# Altium PCB KAAI3020_TESTPcbDoc.PcbDoc (part 3 of 3)
Units mil, origin at the board's own origin, x right, y up, seen from the top; angles counter-clockwise.
Board outline 6000 x 5905.51 mil, 4 copper layers (Top Layer, Inner Layer L2, Inner Layer L3, Bottom Layer), stack 62.449 mil thick; 253 components, 94 nets, 550 pads, 119 vias.
Unrouted connection lines stored in the file: 5.
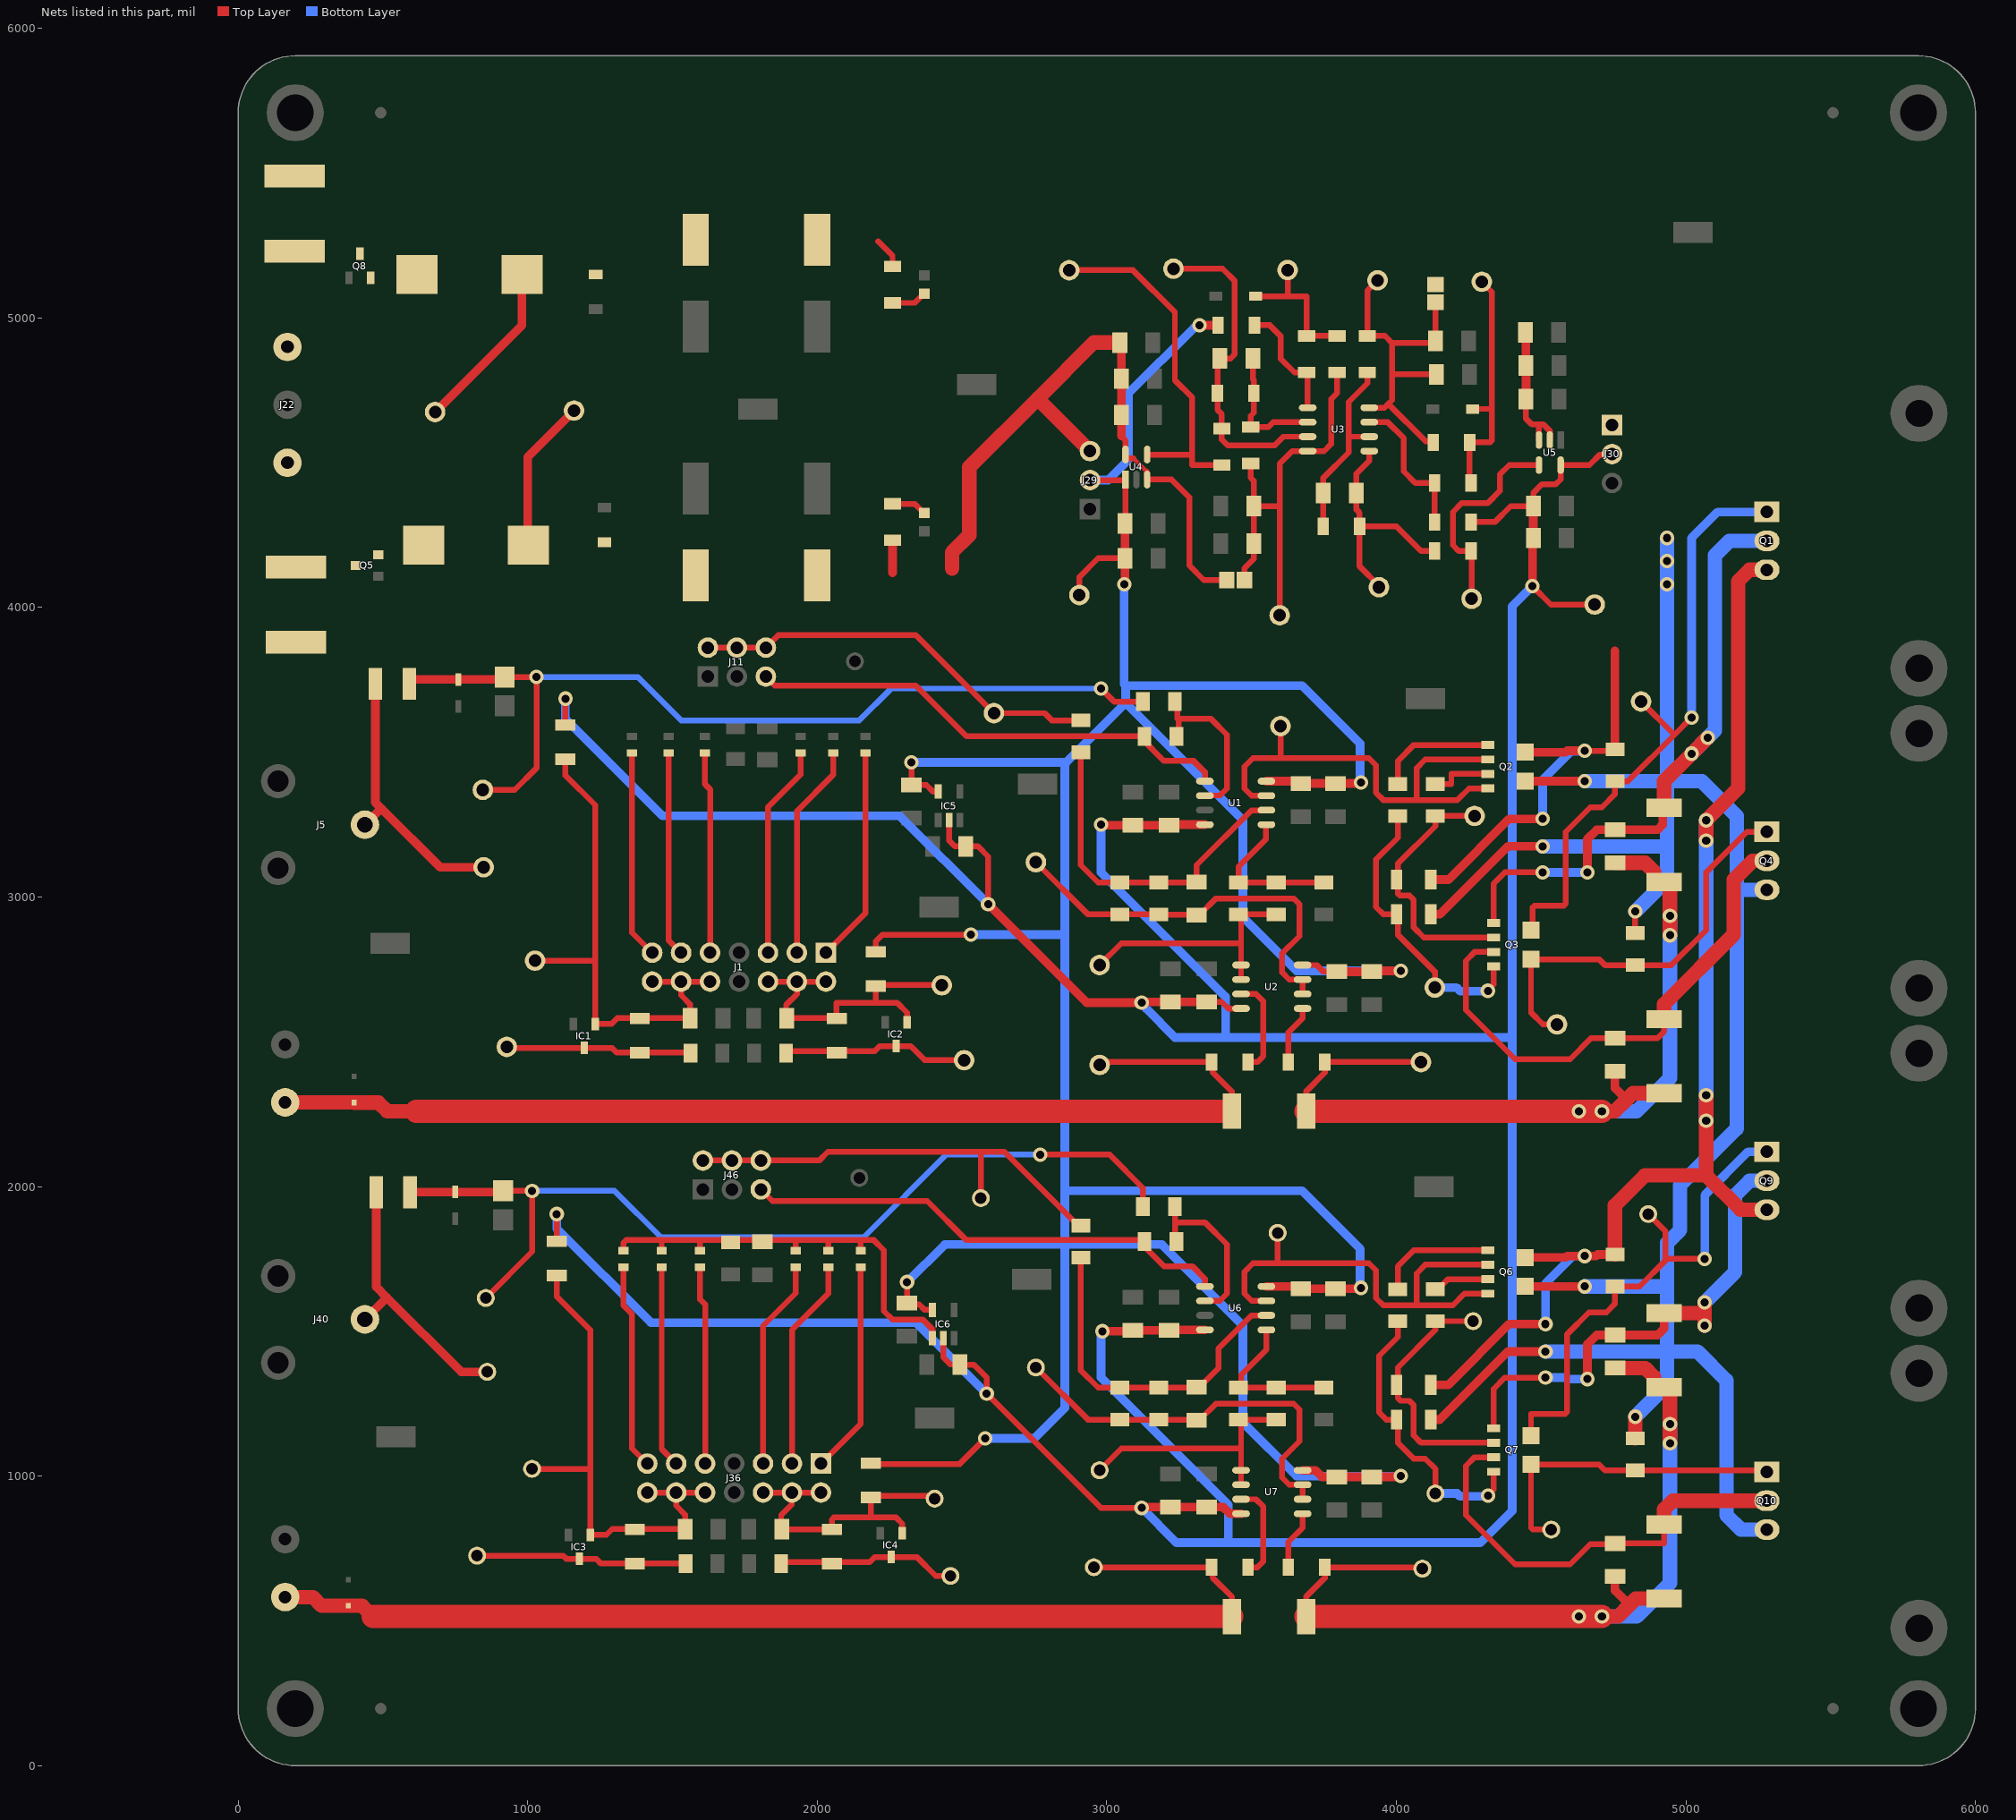
[diagram p4: the nets of this part, all layers, seen from the top]

## Via types
v1: diameter 50, hole 28, Top Layer to Bottom Layer, tented both sides, 117 vias
v2: diameter 50, hole 28, Top Layer to Bottom Layer, 2 vias

## Nets (pads, with @x,y where several pads share a name; then routed paths per layer and width w, separated by ;. In a path a pad name is that pad's centre, name@x,y a point inside that pad or via, vN(x,y) a via of type N, cw(c..) or ccw(c..) an arc to the next point about the centre after c; other vN are vias at no path point) (continued)
NetC4_1: C4.1 C5.2 J15.1 R20.1 R21.2 R23.2 R25.1 | length 3251.6
  Top Layer w20: R21.2@3687.95,2260 3687.95,2327.95 3752.99,2392.99 R25.1@3752.99,2430 J15.1@4085,2430
  Top Layer w30: C5.2@4755,2397.91 4755,2340 4795,2300
  Top Layer w50: v1(4710,2260) 4755,2260 4795,2300 4817.05,2322.05 R23.2@4925,2322.05 ; C4.1@4755,3117.91 4859.13,3117.91 4888.98,3088.07 4888.98,3058.54 4895.47,3052.05 R20.1@4947.26,3052.05 ; R20.1@4938.5,3052.05 4945,3045.55 v1(4945,2867.95)
  Top Layer w80: R21.2@3687.95,2260 v1(4630.84,2260) v1(4710,2260)
  Bottom Layer w50: v1(4630.84,2260) v1(4710,2260) 4830,2260 4945,2375 v1(4945,2935)
NetC4_2: C4.2 Q1.2 Q3.1 R20.2 | length 2154.9
  Top Layer w20: Q3.1@4336.06,2910 4336.06,3046.06 4375,3085 v1(4505,3085)
  Top Layer w30: v1(4660,3085) 4660,3200 4692.09,3232.09 C4.2@4755,3232.09 4902.09,3232.09 4920,3250 4920,3302.95 R20.2@4925,3307.95
  Top Layer w50: R20.2@4925,3307.95 4925,3400 v2(5020,3495) v2(5075,3550)
  Bottom Layer w30: v1(4505,3085) v1(4660,3085)
  Bottom Layer w50: v2(5020,3495) v2(5075,3550) 5100,3575 5100,4180 5150,4230 Q1.2@5280,4230
NetC5_1: C5.1 Q3.3 Q4.2 R23.1 | length 1839.6
  Top Layer w20: Q3.3@4336.06,2810 4270,2810 4240,2780 4240,2610 4410,2440 4600,2440 4672.09,2512.09 C5.1@4755,2512.09 4902.09,2512.09 4925,2535 R23.1@4925,2577.95
  Top Layer w50: R23.1@4925,2577.95 4925,2630 5165,2870 5165,3060 5230.05,3125.05 Q4.2@5280,3125.05
NetC6_1: C6.1 R22.1 R29.1 R30.1 U1.6 | length 1194.7
  Top Layer w20: R22.1@2910,3499.76 2910,3110 2969.88,3050.12 R30.1@3045,3050.12 3127.17,3050.12 R29.1@3180,3050.12 ; R29.1@3180.98,3051.1 R29.1@3180,3050.12 ; U1.6@3551.3,3300 3550.61,3299.31 3499.31,3299.31 3310,3110 C6.1@3310,3052.09 3308.03,3050.12 R29.1@3180,3050.12
NetC6_2: C6.2 J19.1 R29.2 R30.2 U2.6 U2.7 | length 1409.4
  Top Layer w20: J19.1@2755,3120 2935.12,2939.88 R30.2@3045,2939.88 R29.2@3180,2939.88 3180.98,2938.9 C6.2@3309.02,2938.9 ; C6.2@3310,2937.91 C6.2@3309.02,2938.9 ; U2.6@3676.3,2665 U2.7@3676.3,2715 3630,2715 3605,2740 3605,2805 3665,2865 3665,2975 3645,2995 3376.93,2995 3320.83,2938.9 C6.2@3309.02,2938.9
NetC24_1: C24.1 R37.1 R38.2 U3.6 | length 446.9
  Top Layer w20: C24.1@3504.09,4860 3504.09,4788.93 3507.99,4785.04 R38.2@3507.99,4740 3507.99,4672.99 3497.01,4662.01 R37.1@3497.01,4622.99 3557.99,4622.99 3575,4640 U3.6@3693.7,4640
NetC24_2: C24.2 J25.1 R38.1 R39.1 U3.7 | length 1147.9
  Top Layer w20: J25.1@3230,5170 3400,5170 3442.01,5127.99 3442.01,4875 3427.01,4860 C24.2@3389.92,4860 3382.01,4852.09 R38.1@3382.01,4740 3382.01,4682.99 3397.01,4667.99 R39.1@3397.01,4617.99 3397.01,4580 3417.43,4559.58 3579.58,4559.58 3610,4590 U3.7@3693.7,4590
NetC33_1: C33.1 R41.1 R42.2 U3.2 | length 666.7
  Top Layer w20: R42.2@3747.01,4280 3747.01,4394.09 C33.1@3747.91,4395 3747.91,4447.91 3835,4535 3835,4590 ; R41.1@3900,4812.01 3900,4775 3835,4710 3835,4590 ; U3.2@3906.3,4590 3835,4590
NetC33_2: C33.2 J34.1 R40.2 R42.1 U3.1 | length 814.8
  Top Layer w20: U3.1@3906.3,4540 3906.3,4506.3 3862.09,4462.09 C33.2@3862.09,4395 3862.09,4337.91 3872.99,4327.01 R42.1@3872.99,4280 ; J34.1@3940,4070 3940,4075 3872.99,4142.01 R42.1@3872.99,4280 ; R40.2@4132.01,4195 4085,4195 4000,4280 R42.1@3872.99,4280
NetC37_1: C37.1 IC6.1 R46.1 R47.1 R48.1 R49.1 R50.1 R51.1 R52.2 | length 1571.9
  Top Layer w20: R51.1@1330,1778.54 1330,1804.84 1340,1814.84 1460,1814.84 ; R50.1@1462.6,1778.54 1462.6,1812.24 1460,1814.84 ; R49.1@1595.2,1780.39 1595.2,1814.64 1595,1814.84 ; R52.2@1700.2,1806.96 R52.2@1700.2,1814.84 ; R48.1@1925.2,1780.39 1925.2,1810.68 1929.35,1814.84 ; R47.1@2037.7,1780.39 2037.7,1809.93 2042.6,1814.84 ; R46.1@2150.2,1780.39 2150.2,1814.64 2150,1814.84 ; IC6.1@2397.6,1475.79 2397.6,1507.4 2365,1540 2260,1540 2230,1570 2230,1780 2195.16,1814.84 2150,1814.84 ; 1460,1814.84 1595,1814.84 ; 1595,1814.84 R52.2@1700.2,1814.84 ; R52.2@1700.2,1814.84 1804.29,1814.84 C37.1@1810.2,1808.93 1816.1,1814.84 1929.35,1814.84 ; 1929.35,1814.84 2042.6,1814.84 ; 2042.6,1814.84 2150,1814.84
NetC38_1: C38.1 C39.2 J50.1 R65.1 R66.2 R68.2 R70.1 | length 3254.1
  Top Layer w20: R66.2@3687.95,515 3687.95,582.95 3752.99,647.99 R70.1@3752.99,685 4085,685 J50.1@4090,680
  Top Layer w30: C39.2@4755,652.91 4755,605 4805,555
  Top Layer w50: v1(4710,515) 4765,515 4805,555 4827.05,577.05 R68.2@4925,577.05 ; C38.1@4755,1372.91 4859.13,1372.91 4888.98,1343.07 4888.98,1313.54 4895.47,1307.05 4938.5,1307.05 4945,1300.55 v1(4945,1112.95)
  Top Layer w80: R66.2@3687.95,515 v1(4630.84,515) v1(4710,515)
  Bottom Layer w50: v1(4630.84,515) v1(4710,515) 4830,515 4945,630 v1(4945,1180)
NetC38_2: C38.2 Q7.1 Q9.2 R65.2 | length 1784.3
  Top Layer w20: Q7.1@4336.06,1165 4336.06,1301.06 4375,1340 v1(4515,1340)
  Top Layer w30: v1(4660,1335) 4660,1455 4692.09,1487.09 C38.2@4755,1487.09 4902.09,1487.09 4925,1510 R65.2@4925,1562.95
  Top Layer w50: R65.2@4925,1562.95 5062.05,1562.95 5065,1560 ; v1(5065,1520) 5065,1560 ; v1(5065,1600) 5065,1560
  Bottom Layer w30: v1(4515,1340) 4585,1340 4590,1335 v1(4660,1335)
  Bottom Layer w50: v1(5065,1520) v1(5065,1600) 5170,1705 5170,1969.89 5220.05,2019.95 Q9.2@5280,2019.95
NetC39_1: C39.1 Q7.3 Q10.2 R68.1 | length 1549
  Top Layer w20: Q7.3@4336.06,1065 4270,1065 4240,1035 4240,865 4410,695 4600,695 4670,765 4742.09,765 4744.17,767.09 4925,767.09 R68.1@4925,832.95
  Top Layer w50: R68.1@4925,832.95 4925,885 4954.84,914.84 Q10.2@5280,914.84
NetC40_1: C40.1 R67.1 R74.1 R75.1 U6.6 | length 1199.1
  Top Layer w20: R67.1@2910,1754.76 2910,1365 2969.88,1305.12 R75.1@3045,1305.12 3127.17,1305.12 R74.1@3180,1305.12 3180.98,1306.1 3318.86,1306.1 3385,1372.24 3385,1440 3499.31,1554.31 3550.61,1554.31 U6.6@3551.3,1555
NetC40_2: C40.2 J54.1 R74.2 R75.2 U7.6 U7.7 | length 1409.4
  Top Layer w20: J54.1@2755,1375 2935.12,1194.88 R75.2@3045,1194.88 R74.2@3180,1194.88 3180.98,1193.9 C40.2@3309.02,1193.9 ; C40.2@3310,1192.91 C40.2@3309.02,1193.9 ; U7.6@3676.3,920 U7.7@3676.3,970 3630,970 3605,995 3605,1060 3665,1120 3665,1230 3645,1250 3376.93,1250 3320.83,1193.9 C40.2@3309.02,1193.9
NetD1_2: D1.2 J2.1 J16.1 R21.1 R26.1 | length 3864.5
  Top Layer w20: J16.1@2975,2420 2983.96,2428.96 3002.78,2428.96 3003.82,2430 R26.1@3362.01,2430 3365.11,2426.9 3365.11,2394.89 3432.05,2327.95 R21.1@3432.05,2260
  Top Layer w50: J2.1@162.16,2290.63 400,2290.63 D1.2@400,2290.12 484.33,2290.12 514.45,2260 615,2260
  Top Layer w80: 615,2260 R21.1@3423.54,2260
NetD2_1: D2.1 F1.2 J4.1 R16.2 R79.2 | length 3193.9
  Top Layer w20: D2.1@760,3751.26 D2.1@760.08,3751.34 ; J4.1@845,3370 955,3370 1030,3445 v1(1030,3760) R79.2@920,3760 ; v1(2980,3720) 3025,3675 R16.2@3117.01,3675
  Top Layer w30: F1.2@590.63,3736.34 590.63,3743.03 598.86,3751.26 D2.1@760,3751.26 ; D2.1@760.08,3751.34 R79.2@920,3751.34
  Bottom Layer w20: v1(1030,3760) 1380,3760 1530,3610 2145,3610 2255,3720 v1(2980,3720)
NetD3_2: D3.2 J24.1 R34.2 R36.2 | length 508.9
  Top Layer w20: D3.2@3513.9,5075 3515,5075 3625,5075 ; J24.1@3624.6,5165.4 3625,5165.4 3625,5075 ; R36.2@3795,4937.99 R34.2@3690,4937.99 3690,5075 3625,5075
NetD4_1: D4.1 J35.1 R43.1 R44.2 | length 850.6
  Top Layer w20: R44.2@4257.99,4430 4252.99,4435 R43.1@4252.99,4570 4323.12,4570 4330,4576.88 4330,4685.79 ; D4.1@4263.9,4685.79 4330,4685.79 ; J35.1@4295,5125 4330,5090 4330,4685.79
NetD5_2: D5.2 J37.1 J51.1 R66.1 R71.1 | length 3871.6
  Top Layer w20: J51.1@2955,685 R71.1@3362.01,685 3365.11,681.9 3365.11,649.89 3432.05,582.95 R66.1@3432.05,546.96
  Top Layer w50: J37.1@162.16,581.84 258.16,581.84 288.04,551.96 D5.2@380.2,551.96 428.04,551.96 465,515
  Top Layer w80: 465,515 R66.1@3432.05,515
NetD6_1: D6.1 F4.2 J39.1 R61.2 R80.2 | length 3272.5
  Top Layer w20: F4.2@593.46,1980 F4.2@594.72,1981.26 ; J39.1@855,1615 1015,1775 v1(1015,1985) R80.2@915,1985 ; R80.2@910.08,1981.26 915,1976.34 R80.2@918.66,1980 ; v1(2770,2110) 3010,2110 3124.88,1995.12 R61.2@3124.88,1930
  Top Layer w30: F4.2@594.72,1981.26 D6.1@750,1981.26 R80.2@910.08,1981.26
  Bottom Layer w20: v1(1015,1985) 1300,1985 1460,1825 2160,1825 2445,2110 v1(2770,2110)
NetF1_1: F1.1 J3.1 J5.1 | length 956.3
  Top Layer w30: J5.1@437.8,3250 492.8,3305 495,3305 ; F1.1@473.7,3736.34 473.7,3326.3 495,3305 ; J3.1@847.33,3102.67 697.33,3102.67 495,3305
NetF2_1: F2.1 J22.1
NetF2_2: F2.2 Q5.3
NetF3_1: F3.1 J22.3
NetF3_2: F3.2 Q8.3
NetF4_1: F4.1 J38.1 J40.1 | length 938.8
  Top Layer w30: J40.1@437.8,1541.21 512.5,1615.92 512.5,1617.5 ; F4.1@476.54,1980 476.54,1653.46 512.5,1617.5 ; J38.1@860,1360 770,1360 512.5,1617.5
NetIC1_3: IC1.3 J8.1 R11.1 R13.2 | length 643.3
  Top Layer w20: J8.1@927.5,2482.5 931.34,2478.66 IC1.3@1194.96,2478.66 1291.34,2478.66 1307.72,2462.28 R11.1@1387.16,2462.28 1561.1,2462.28 R13.2@1562.04,2461.34
NetIC2_3: IC2.3 J9.1 R12.1 R14.2 | length 644.8
  Top Layer w20: R14.2@1892.28,2461.34 1898.23,2467.28 2067.16,2467.28 2198.11,2467.28 2215.82,2485 IC2.3@2272.16,2485 2322.3,2485 2370.96,2436.34 J9.1@2507.16,2436.34
NetIC3_3: IC3.3 J43.1 R56.1 R58.2 | length 725.2
  Top Layer w20: J43.1@825,725 1122.31,725 1133.14,714.17 IC3.3@1177.99,714.17 1236.41,714.17 1252.79,697.79 R56.1@1370.2,697.79 ; R56.1@1376.75,697.79 1544.13,697.79 R58.2@1545.08,696.84
NetIC4_3: IC4.3 J44.1 R57.1 R59.2 | length 621.6
  Top Layer w20: R59.2@1875.31,696.84 1881.26,702.79 2050.2,702.79 2181.14,702.79 2198.86,720.51 IC4.3@2255.2,720.51 2343.71,720.51 2409.22,655 J44.1@2460,655
NetJ1_1: J1.1 R1.2 | length 747.2
  Top Layer w20: J1.1@2029.64,2807.6 2167.16,2945.12 R1.2@2167.16,3497.8
NetJ1_3: J1.3 R2.2 | length 742
  Top Layer w20: J1.3@1929.64,2807.6 1929.64,3296.81 2054.66,3421.83 R2.2@2054.66,3497.8
NetJ1_5: J1.5 R3.2 | length 736.8
  Top Layer w20: J1.5@1829.64,2807.6 1829.64,3310.46 1942.16,3422.98 R3.2@1942.16,3497.8
NetJ1_9: J1.9 R4.2 | length 697.4
  Top Layer w20: R4.2@1612.16,3497.8 1612.16,3389.57 1629.64,3372.09 J1.9@1629.64,2807.6
NetJ1_11: J1.11 R5.2 | length 708.2
  Top Layer w20: R5.2@1486.08,3497.8 1486.08,2851.16 J1.11@1529.64,2807.6
NetJ1_13: J1.13 R6.2 | length 719
  Top Layer w20: R6.2@1360,3497.8 1360,2877.24 1377.16,2860.08 J1.13@1429.64,2807.6
NetJ10_1: J10.1 J11.2 J11.4 J11.6 R22.2 | length 1428.1
  Top Layer w20: J11.2@1622.16,3861.34 J11.4@1722.16,3861.34 J11.6@1822.16,3861.34 1865.82,3905 2340,3905 J10.1@2610,3635 2785,3635 2810,3610 R22.2@2910,3610
NetJ11_5: J11.5 R15.2 U1.1 | length 1683
  Top Layer w20: J11.5@1822.16,3761.34 1853.5,3730 2340,3730 2515,3555 3112.32,3555 3122.01,3545.31 3122.01,3545.16 3197.17,3470 3300,3470 3338.7,3431.3 U1.1@3338.7,3401.59
NetJ12_1: J12.1 Q3.2 R17.1 R19.2 | length 906.7
  Top Layer w20: J12.1@4270,3280 4135.12,3280 R19.2@4135,3279.88 4135,3245 4004.88,3114.88 4004.88,3060 4004.88,3011.88 4011.77,3005 4045,3005 4060,2990 4060,2895 4095,2860 Q3.2@4336.06,2860
NetJ13_1: J13.1 Q1.1 Q3.7_8 R18.1 | length 2153.8
  Top Layer w20: Q3.7_8@4465,2885 4470,2890 4470,2963.12 4476.88,2970 4578.12,2970 4585,2976.88 4585,3225 4670,3310 4710,3310 4755,3355 R18.1@4755,3399.88 4799.88,3399.88 4960,3560 ; J13.1@4845,3675 4960,3560 ; v1(5020,3620) 4960,3560
  Bottom Layer w30: v1(5020,3620) 5020,4240 5110,4330 Q1.1@5280,4330
NetJ14_1: J14.1 Q2.2 Q2.4 U1.7 | length 1628
  Top Layer w20: U1.7@3551.3,3350 3500,3350 3475,3375 3475,3450 3505,3480 3595,3480 ; J14.1@3600,3590 3600,3485 3595,3480 ; Q2.4@4316.06,3375 4250.77,3375 4210.77,3335 4070,3335 ; Q2.2@4316.06,3475 4100,3475 4070,3445 4070,3335 ; 3595,3480 3905,3480 3930,3455 3930,3360 3955,3335 4070,3335
NetJ17_1: J17.1 Q3.4 R24.1 R27.2 | length 1017.8
  Top Layer w20: R24.1@4005,3279.76 4005,3205 3930,3130 3930,2965 3955,2940 4004.88,2940 4004.88,2870.12 4132.85,2742.15 J17.1@4132.85,2687.15 ; v1(4316,2676) 4316,2677.82 4336.06,2697.88 Q3.4@4336.06,2760
  Bottom Layer w30: J17.1@4132.85,2687.15 4207.85,2687.15 4220,2675 4315,2675 v1(4316,2676)
NetJ18_1: J18.1 Q3.5_6 Q4.1 R28.2 | length 1422.1
  Top Layer w20: J18.1@4555,2560 4505.99,2560 4465,2600.99 Q3.5_6@4465,2785 4700,2785 4720.12,2764.88 R28.2@4825,2764.88 4949.88,2764.88 5070,2885 5070,3085 5210.05,3225.05 Q4.1@5280,3225.05
NetJ20_1: J20.1 R31.2 R32.2 U2.1 U2.2 | length 878.3
  Top Layer w20: J20.1@2975,2765 3050,2840 3463.7,2840 ; U2.2@3463.7,2715 U2.1@3463.7,2765 3463.7,2840 ; R31.2@3585,2939.88 R32.2@3455,2939.88 3463.7,2931.18 3463.7,2840
NetJ27_1: J27.1 R39.2 U4.4 | length 1235.2
  Top Layer w20: J27.1@2870,5165 3090,5165 3235,5020 3235,4785 3295,4725 3295,4528 ; U4.4@3139.73,4528 3295,4528 ; R39.2@3397.01,4492.01 3295,4492.01 3295,4528
NetJ29_3: J29.3 U4.5
NetJ32_1: J32.1 R40.1 U5.4 | length 766.6
  Top Layer w20: R40.1@4257.99,4185.16 R40.1@4260,4183.15 ; J32.1@4260,4030 4260,4192.99 R40.1@4257.99,4195 4257.99,4204.69 4248.31,4195 4215,4195 4195,4215 4195,4330 4225,4360 4315,4360 4357.86,4402.86 4357.86,4459.86 4389.67,4491.68 U5.4@4492.6,4491.68
NetJ36_1: J36.1 R46.2 | length 737.2
  Top Layer w20: J36.1@2012.68,1043.1 2150.2,1180.62 R46.2@2150.2,1723.3
NetJ36_3: J36.3 R47.2 | length 732
  Top Layer w20: J36.3@1912.68,1043.1 1912.68,1505.32 2037.7,1630.34 R47.2@2037.7,1723.3
NetJ36_5: J36.5 R48.2 | length 726.8
  Top Layer w20: J36.5@1812.68,1043.1 1812.68,1519.16 1925.2,1631.68 R48.2@1925.2,1723.3
NetJ36_9: J36.9 R49.2 | length 687.4
  Top Layer w20: R49.2@1595.2,1723.3 1595.2,1610.08 1612.68,1592.6 J36.9@1612.68,1043.1
NetJ36_11: J36.11 R50.2 | length 700.9
  Top Layer w20: R50.2@1462.6,1723.3 1462.6,1093.18 J36.11@1512.68,1043.1
NetJ36_13: J36.13 R51.2 | length 712.6
  Top Layer w20: R51.2@1330,1721.46 1330,1590.2 1360.2,1560 1360.2,1095.58 J36.13@1412.68,1043.1
NetJ45_1: J45.1 J46.2 J46.4 J46.6 R67.2 | length 1587.8
  Top Layer w20: J46.2@1605,2090 J46.4@1705,2090 1796.84,2090 J46.6@1805,2081.84 ; J46.6@1805,2090 2006.87,2090 2036.87,2120 2565,2120 ; J45.1@2565.99,1960.99 J45.1@2565,1960 2565,2120 ; R67.2@2910,1865 2901.14,1865 2646.14,2120 2565,2120
NetJ46_5: J46.5 R60.2 U6.1 | length 1695
  Top Layer w20: J46.5@1805,1990 1845,1950 2380,1950 2515,1815 3122.01,1815 3122.01,1800.16 3197.17,1725 3295,1725 3338.7,1681.3 U6.1@3338.7,1656.59
NetJ47_1: J47.1 Q7.2 R62.1 R64.2 | length 905.7
  Top Layer w20: J47.1@4265,1535 4135.12,1535 R64.2@4135,1534.88 4134.64,1534.52 4134.64,1504.64 4005,1375 4005,1315.12 4004.88,1315 4004.88,1270.12 4015,1260 4045,1260 4060,1245 4060,1140 4085,1115 Q7.2@4336.06,1115
NetJ48_1: J48.1 Q7.7_8 Q9.1 R63.1 | length 1773.6
  Top Layer w20: Q7.7_8@4465,1140 4465,1215 4583.12,1215 4590,1221.88 4590,1489.88 4665.12,1565 4725,1565 4755,1595 R63.1@4755,1654.88 4839.88,1654.88 4930,1745 4930,1750 ; J48.1@4870,1905 4930,1845 4930,1750 ; v1(5065,1750) 4930,1750
  Bottom Layer w30: v1(5065,1750) 5065,1970 5215,2120 5279.95,2120 Q9.1@5280,2119.95 Q9.1@5285,2119.95
NetJ49_1: J49.1 Q6.2 Q6.4 U6.7 | length 1620.9
  Top Layer w20: U6.7@3551.3,1605 3500,1605 3475,1630 3475,1705 3505,1735 3590,1735 ; J49.1@3590,1840 3590,1735 ; Q6.4@4316.06,1630 4235,1630 4195,1590 4070,1590 ; Q6.2@4316.06,1730 4100,1730 4070,1700 4070,1590 ; 3590,1735 3905,1735 3930,1710 3930,1615 3955,1590 4070,1590
NetJ52_1: J52.1 Q7.4 R69.1 R72.2 | length 1027.1
  Top Layer w20: R69.1@4005,1534.76 4005,1480 3940,1415 3940,1220 3965,1195 4004.88,1195 4004.88,1115.12 4060,1060 4100,1060 4135,1025 J52.1@4135,940 ; v1(4317,932) 4317,934.82 4336.06,953.88 Q7.4@4336.06,1015
  Bottom Layer w30: J52.1@4135,940 4210,940 4220,930 4315,930 v1(4317,932)
NetJ53_1: J53.1 Q7.5_6 Q10.1 R73.2 | length 1116.4
  Top Layer w20: J53.1@4535,815 4471.88,815 4465,821.88 Q7.5_6@4465,1040 4700,1040 4720.12,1019.88 R73.2@4825,1019.88 5274.96,1019.88 Q10.1@5280,1014.84
NetJ55_1: J55.1 R76.2 R77.2 U7.1 U7.2 | length 869.6
  Top Layer w20: J55.1@2975,1020 3050,1095 3463.7,1095 ; R77.2@3455,1194.88 3463.7,1186.18 3463.7,1095 ; U7.2@3463.7,970 U7.1@3463.7,1020 3463.7,1095 ; R77.2@3463.7,1194.88 R76.2@3585,1194.88
NetL1_1: L1.1 Q5.2
NetL2_2: L2.2 Q8.2
NetLED1_1: LED1.1 R8.1 | length 123.9
  Top Layer w20: R8.1@2260,5052.01 2336.54,5052.01 LED1.1@2370,5085.47
NetLED2_2: LED2.2 R53.1 | length 123.9
  Top Layer w20: R53.1@2260,4357.99 2336.54,4357.99 LED2.2@2370,4324.53
NetQ2_1: Q2.1 R24.2 | length 413.8
  Top Layer w20: R24.2@4005,3390 4005,3470 4060,3525 Q2.1@4316.06,3525
NetQ2_3: Q2.3 R19.1 | length 215.9
  Top Layer w20: R19.1@4135,3390.12 4190,3390.12 4190,3425 Q2.3@4316.06,3425
NetQ6_1: Q6.1 R69.2 | length 413.8
  Top Layer w20: R69.2@4005,1645 4005,1725 4060,1780 Q6.1@4316.06,1780
NetQ6_3: Q6.3 R64.1 | length 195.5
  Top Layer w20: R64.1@4135,1645.12 4143.86,1645.12 4178.74,1680 Q6.3@4316.06,1680
NetR15_1: R15.1 R16.1 U1.2 | length 586.4
  Top Layer w20: R16.1@3242.99,3675 3242.99,3615 3360,3615 3415,3560 3415,3375 3390.69,3350.69 3339.39,3350.69 U1.2@3338.7,3350 ; R15.1@3247.99,3555 3247.99,3615
NetR25_2: R25.2 U2.5 | length 205.4
  Top Layer w20: R25.2@3627.01,2430 3627.01,2532.01 3676.3,2581.3 U2.5@3676.3,2615
NetR26_2: R26.2 U2.3 | length 336.9
  Top Layer w20: U2.3@3463.7,2665 3515,2665 3540,2640 3540,2450 3520,2430 R26.2@3487.99,2430
NetR31_1: R31.1 R32.1 R33.2 U1.5 | length 534.8
  Top Layer w20: U1.5@3551.3,3250 3549.9,3248.61 3549.9,3199.9 3455,3105 R32.1@3455,3050.12 R31.1@3585,3050.12 R33.2@3750,3050.12
NetR34_1: R34.1 R35.2 U3.5 | length 414.8
  Top Layer w20: R35.2@3510,4975 3562.78,4975 3600,4937.78 3600,4860 3647.99,4812.01 R34.1@3690,4812.01 3693.31,4808.7 U3.5@3693.31,4691.67
NetR44_1: R44.1 R45.2 U3.3 | length 514.8
  Top Layer w20: U3.3@3906.89,4640.69 3969.31,4640.69 4025,4585 4025,4470 4065,4430 R44.1@4132.01,4430 R45.2@4132.01,4295
NetR60_1: R60.1 R61.1 U6.2 | length 589.7
  Top Layer w20: R61.1@3235.12,1930 3235.12,1875.12 ; R60.1@3240.12,1810 3235.12,1815 3235.12,1875.12 ; U6.2@3338.7,1605 3390,1605 3415,1630 3415,1800 3339.88,1875.12 3235.12,1875.12
NetR70_2: R70.2 U7.5 | length 205.4
  Top Layer w20: R70.2@3627.01,685 3627.01,772.01 3676.3,821.3 U7.5@3676.3,870
NetR71_2: R71.2 U7.3 | length 336.9
  Top Layer w20: U7.3@3463.7,920 3515,920 3540,895 3540,705 3520,685 R71.2@3487.99,685
NetR76_1: R76.1 R77.1 R78.2 U6.5 | length 534.8
  Top Layer w20: U6.5@3551.3,1505 3551.3,1436.3 3465,1350 3465,1315.12 R77.1@3455,1305.12 R78.2@3750,1305.12
Vcc: C15.1 C16.1 C17.2 C18.2 C25.2 J21.1 L1.2 L3.1 Q1.3 Q2.7_8 Q6.7_8 Q9.3 R17.2 R18.2 R53.2 R62.2 R63.2 U4.3 Z1.1 | length 8790.9
  Top Layer w15: 3092.01,4515 U4.3@3138.93,4468.08
  Top Layer w20: 3049.92,4592.09 3064.61,4577.4 3064.61,4528.32 3064.61,4516.17 3065.77,4515 3092.01,4515 ; U4.3@3138.93,4468.08 3138.93,4442.16 U4.3@3139.41,4441.68 3223.32,4441.68 3285,4380 3285,4145 3335,4095 L3.1@3414.45,4095 ; v1(4650,3505) 4749.88,3505 R18.2@4755,3510.12 ; 5067.5,2182.5 5070,2182.5
  Top Layer w30: L1.2@1002.2,4215 1000,4217.2 1000,4520 J21.1@1160,4680 ; 2260,4120.44 R53.2@2260,4232.01 ; C17.2@3044.92,4915 3049.92,4910 C18.2@3049.92,4790 C25.2@3049.92,4665 3049.92,4592.09 ; R62.2@4115.12,1315 4180,1315 4390,1525 v1(4515,1525) ; R17.2@4115.12,3060 R17.2@4119.06,3060 4180,3060 4390,3270 v1(4505,3270) ; Q6.7_8@4445,1755 4585,1755 4590,1760 v1(4650,1760) 4690,1760 4695.12,1765.12 R63.2@4755,1765.12 ; Q2.7_8@4445,3500 4585,3500 4590,3505 v1(4650,3505) ; R18.2@4755,3510.12 4755,3850
  Top Layer w50: 2465,4135 2465,4190 2525,4250 2525,4485 2762.5,4722.5 ; 2942.01,4540 2762.5,4719.51 2762.5,4722.5 ; C17.2@3044.92,4915 2955,4915 2762.5,4722.5 ; R63.2@4755,1765.12 4755,1935 4858.48,2038.48 5070,2038.48 ; v1(5070,2315) v1(5070,2227.5) 5070,2182.5 5070,2038.48 ; v1(5070,3195) v1(5070,3265) 5180,3375 5180,4090 5220,4130 Q1.3@5280,4130 ; Q9.3@5285,1919.95 5188.53,1919.95 5070,2038.48
  Bottom Layer w30: v1(4505,3270) 4505,3405 4603.49,3503.49 4648.49,3503.49 v1(4650,3505) ; v1(4515,1525) 4515,1665 4610,1760 v1(4650,1760)
  Bottom Layer w50: v1(5070,2227.5) v1(5070,3265)
VCC_filtered: C23.2 C28.1 J26.1 L3.2 R36.1 R37.2 U3.8 | length 1494.6
  Top Layer w20: L3.2@3475.55,4095 3475.55,4135.55 3507.09,4167.09 C23.2@3507.09,4220 C28.1@3507.09,4350 ; R37.2@3497.01,4497.01 3497.01,4447.99 3507.09,4437.91 C28.1@3507.09,4350 ; J26.1@3597.01,3972.99 3597.01,4350 ; R36.1@3795,4812.01 3795,4740 3775,4720 3775,4565 3750,4540 U3.8@3693.7,4540 3640,4540 3597.01,4497.01 3597.01,4350 ; C28.1@3507.09,4350 3597.01,4350
VCC_LDO_OUT: C7.2 C8.2 C9.1 C10.1 C26.2 C27.2 C41.2 C42.2 C43.1 C44.1 C49.2 C51.2 IC5.5 IC6.5 J28.1 J29.2 R10.2 R35.1 R55.2 U1.8 U2.8 U4.1 U6.8 U7.8 | length 14247.8
  Top Layer w20: R55.2@2185.2,1041.96 2491.96,1041.96 v1(2580,1130) ; R10.2@2202.16,2806.46 2202.16,2847.16 2225,2870 v1(2530,2870) ; v1(2310,1670) C51.2@2310,1597.09 2314.14,1592.95 2352.05,1592.95 2370,1575 2396.81,1575 IC6.5@2397.6,1574.21 ; v1(2325,3465) C49.2@2325,3387.09 2376.34,3387.09 2399.17,3364.25 2417.56,3364.25 IC5.5@2417.6,3364.21 ; J28.1@2905,4043.11 2905,4105 2970,4170 C27.2@3062.91,4170 ; J29.2@2942.01,4440 3063.34,4440 U4.1@3064.61,4441.26 ; C26.2@3062.91,4290 3064.61,4291.69 U4.1@3064.61,4441.26 ; U4.1@3064.61,4441.68 U4.1@3064.61,4441.26 ; U2.8@3676.3,2765 3725,2765 3747.91,2742.09 C9.1@3795,2742.09
  Top Layer w30: v1(3060,4080) 3062.91,4082.91 C27.2@3062.91,4170 C26.2@3062.91,4290 ; v1(3320,4975) R35.1@3384.02,4975 ; U6.8@3551.3,1655 3662.09,1655 C42.2@3670,1647.09 3874.59,1647.09 v1(3877.5,1650) ; U1.8@3551.3,3400 3662.09,3400 C8.2@3670,3392.09 C7.2@3790,3392.09 3874.59,3392.09 v1(3877.5,3395) ; U7.8@3676.3,1020 3720,1020 3742.91,997.09 C43.1@3795,997.09 ; C9.1@3795,2742.09 C10.1@3915,2742.09 3917.91,2745 v1(4015,2745) ; C43.1@3800,997.09 C44.1@3915,997.09 4012.09,997.09 v1(4015,1000)
  Bottom Layer w30: v1(2310,1670) 2440,1800 2855,1800 ; v1(2325,3465) 2860,3465 ; v1(2530,2870) 2855,2870 ; v1(2580,1130) 2750,1130 2855,1235 2855,1800 ; J29.2@2942.01,4440 3005,4440 3075,4510 3075,4740 3300.99,4965.99 3305.58,4965.99 3314.59,4975 v1(3320,4975) ; v1@3063.83,4076.17 v1(3060,4080) 3060,3735 3065,3730 ; v1(3877.5,1650) 3875,1652.5 3875,1785 3675,1985 2855,1985 ; v1(3877.5,3395) 3875,3397.5 3875,3530 3675,3730 3065,3730 ; v1(4015,1000) 3655,1000 3470,1185 3470,1520 3190,1800 2855,1800 ; v1(4015,2745) 3655,2745 3470,2930 3470,3265 3065,3670 ; 2855,1800 2855,1985 ; 2855,1985 2855,2870 ; 2855,2870 2855,3460 3065,3670 ; 3065,3670 3065,3730
Vdd: C19.2 C20.2 C21.1 C22.1 C30.2 J23.1 J30.1 L2.1 L4.1 Q2.5_6 Q4.3 Q6.5_6 Q10.3 R8.2 R27.1 R28.1 R72.1 R73.1 U5.2 U5.3 Z2.2 | length 8978.4
  Top Layer w20: 2210,5265 2260,5215 R8.2@2260,5177.99 ; C21.1@4445.83,4950 C21.1@4450,4954.17 ; C30.2@4447.91,4720 4447.91,4652.09 4468.22,4631.78 4492.6,4631.78 ; U5.3@4492.6,4578.32 4492.6,4631.78 ; U5.2@4530,4578.32 4530,4610 4508.22,4631.78 4492.6,4631.78 ; R28.1@4825,2875.12 v1(4825,2950)
  Top Layer w30: J23.1@680,4675 980,4975 L2.1@980,5150.48 ; R72.1@4115.12,1195 4150,1195 4385,1430 v1(4515,1430) ; R27.1@4115.12,2940 R27.1@4119.06,2940 4150,2940 4385,3175 v1(4505,3175) ; Q6.5_6@4445,1655 v1(4650,1655) ; Q2.5_6@4445,3400 v1(4650,3400) ; C21.1@4445.83,4950 4446.87,4948.96 4446.87,4836.04 C22.1@4447.91,4835 C30.2@4447.91,4720
  Top Layer w50: R73.1@4825,1130.12 v1(4825,1205)
  Bottom Layer w50: v1(4505,3175) 4935,3175 ; v1(4515,1430) 4935,1430 ; v1(4650,1655) 4930,1655 ; v1(4650,3400) 4935,3400 ; v1(4825,1205) 4935,1315 4935,1430 ; v1(4825,2950) 4935,3060 4935,3175 ; v1(4935,4240) v1(4935,4160) v1(4935,4080) 4935,3400 ; Q10.3@5280,814.84 5190.16,814.84 5140,865 5140,1330 5040,1430 4935,1430 ; Q4.3@5280,3025.05 5175.51,3025.05 5175.45,3025 ; 4935,1430 4935,1805 4980,1850 4980,2005 5175.45,2200.45 5175.45,3025 ; 4935,3175 4935,3400 ; 4935,3400 5055,3400 5175.45,3279.55 5175.45,3025
VDD_filtered: C29.2 C34.2 J33.1 L4.2 R41.2 R43.2 U3.4 | length 1238.7
  Top Layer w20: U3.4@3906.3,4690 3959.25,4690 3972.12,4702.88 ; J33.1@3935,5130 3900,5095 R41.2@3900,4937.99 3960.12,4937.99 3985,4913.12 ; R43.2@4127.01,4570 4122.71,4574.29 4100.71,4574.29 3972.12,4702.88 ; L4.2@4135,5054.45 C34.2@4135,4920 4128.12,4913.12 3985,4913.12 ; C29.2@4137.91,4805 3985,4805 ; 3972.12,4702.88 3985,4715.75 3985,4805 ; 3985,4805 3985,4913.12
VDD_LDO_OUT: C11.1 C12.1 C13.1 C14.1 C31.2 C32.2 C45.1 C46.1 C47.1 C48.1 C50.1 C52.1 IC5.2 IC6.2 J30.2 J31.1 R9.2 R45.1 R54.2 U1.4 U2.4 U5.5 U6.4 U7.4 | length 16147.7
  Top Layer w20: R54.2@1100,1815.12 v1(1100,1905) ; R9.2@1130,3595.12 v1(1130,3685) ; IC6.2@2435,1475.79 2435,1410 2459.88,1385.12 2491.97,1385.12 C52.1@2492.09,1385 2540,1385 2585,1340 v1(2585,1285) 2980,890 v1(3120,890) ; IC5.2@2455,3265.79 2455,3195 2475,3175 C50.1@2512.09,3175 2555,3175 2590,3140 v1(2590,2975) ; v1(3120,2635) v1@3122.91,2637.91 ; C13.1@3345,2637.91 3396.73,2637.91 3419.65,2615 U2.4@3463.7,2615 ; R45.1@4257.99,4295 4340,4295 4395,4350 C31.2@4472.91,4350 4472.91,4395.51 4502.4,4425 4550,4425 4567.4,4442.4 U5.5@4567.4,4491.68 4666.68,4491.68 4702.95,4527.95 4742.95,4527.95 J30.2@4745,4530 ; v1(4470,4073.94) 4533.94,4010 J31.1@4685,4010 ; C32.2@4470,4237.09 C32.2@4472.91,4240
  Top Layer w30: v1(2590,2975) 2930,2635 v1(3120,2635) ; v1(2980,3250) 2982.09,3247.91 C11.1@3090,3247.91 C12.1@3215,3247.91 3230,3247.91 3232.09,3250 U1.4@3338.7,3250 ; v1(2985,1500) 3087.09,1500 C45.1@3090,1502.91 C46.1@3215,1502.91 ; v1(3120,890) 3122.91,892.91 C48.1@3220,892.91 3401.73,892.91 3424.65,870 U7.4@3463.7,870 ; v1@3122.91,2637.91 C14.1@3220,2637.91 C13.1@3345,2637.91 ; C46.1@3217.09,1505 U6.4@3338.7,1505 ; v1(4470,4073.94) C32.2@4470,4237.09 ; C32.2@4472.91,4240 C31.2@4472.91,4350
  Bottom Layer w30: v1(1100,1905) 1100,1855 1425,1530 2340,1530 v1(2585,1285) ; v1(1130,3685) 1130,3615 1465,3280 2285,3280 v1(2590,2975) ; v1(2980,3250) 2980,3085 3410,2655 3410,2515 ; v1(2985,1500) 2981.17,1496.17 2981.17,1482.03 2980,1480.86 2980,1340 3420,900 3420,770 ; v1(3120,890) 3240,770 3420,770 ; v1(3120,2635) 3120,2631.88 3135.47,2616.41 3135.47,2614.53 3235,2515 3410,2515 ; v1(4470,4073.94) 4400,4003.94 4400,2515 ; 3410,2515 4400,2515 ; 3420,770 4290,770 4400,880 4400,2515
Vref+_A: C1.1 IC2.1 J1.2 J1.4 J1.6 J7.1 R10.1 R12.2 | length 1148.6
  Top Layer w20: J1.6@1829.64,2707.6 J1.4@1929.64,2707.6 ; J1.2@2029.64,2707.6 J1.4@1929.64,2707.6 ; IC2.1@2309.96,2567.68 2309.96,2600.33 2275.29,2635 2202.16,2635 ; J7.1@2430,2695 2428.78,2696.22 2202.16,2696.22 2202.16,2635 ; J1.4@1929.64,2707.6 1929.64,2664.64 1892.16,2627.16 1892.16,2583.43 C1.1@1894.25,2581.34 2066.22,2581.34 2066.22,2635 2202.16,2635
Vref+_B: C35.1 IC4.1 J36.2 J36.4 J36.6 J42.1 R55.1 R57.2 | length 1137.3
  Top Layer w20: J36.6@1812.68,943.1 J36.4@1912.68,943.1 ; C35.1@1877.28,816.84 C35.1@1878.23,815.9 ; J36.2@2012.68,943.1 J36.4@1912.68,943.1 ; IC4.1@2292.99,803.18 2292.99,835.84 2271.98,856.84 2185.2,856.84 ; J42.1@2405.2,921.84 2392.53,921.84 2382.65,931.73 2185.2,931.73 2185.2,856.84 ; C35.1@1878.23,815.9 1875.2,818.93 1875.2,865.2 1911.05,901.05 1911.05,941.48 J36.4@1912.68,943.1 ; C35.1@1878.23,815.9 R57.2@2050.2,815.9 2050.2,849.96 2057.08,856.84 2185.2,856.84
Vref-_A: C2.2 IC1.1 J1.10 J1.12 J1.14 J6.1 R9.1 R11.2 | length 1841.3
  Top Layer w20: J6.1@1025,2780 1230,2780 1232.75,2777.25 ; R9.1@1130,3475.94 1130,3420 1232.75,3317.25 1232.75,2777.25 ; J1.14@1429.64,2707.6 J1.12@1529.64,2707.6 ; J1.10@1629.64,2707.6 J1.12@1529.64,2707.6 ; 1232.75,2777.25 IC1.1@1232.75,2561.34 1289.13,2561.34 1309.13,2581.34 1386.22,2581.34 R11.2@1387.16,2580.39 1388.11,2581.34 C2.2@1560.08,2581.34 1560.08,2629.92 1529.64,2660.36 J1.12@1529.64,2707.6
Vref-_B: C36.2 IC3.1 J36.10 J36.12 J36.14 J41.1 R54.1 R56.2 | length 1819.9
  Top Layer w20: J41.1@1015,1025 1215.79,1025 ; R54.1@1100,1692.79 1100,1620 1215.79,1504.21 1215.79,1025 ; J36.14@1412.68,943.1 J36.12@1512.68,943.1 ; J36.10@1612.68,943.1 J36.12@1512.68,943.1 ; 1215.79,1025 IC3.1@1215.79,796.84 1272.17,796.84 1292.17,816.84 1369.25,816.84 R56.2@1370.2,815.9 1371.14,816.84 C36.2@1543.11,816.84 1543.11,866.89 1512.68,897.32 J36.12@1512.68,943.1
pads on no net: FID1.FID1 FID2.FID1 FID3.FID1 FID4.FID1 FID5.FID1 FID6.FID1 FID7.FID1 FID8.FID1 J29.1 J30.3
copper on no net: | length 7520.5
  Top Layer w3.5: 566.93,196.85 ccw(c492.13,196.85) 566.93,196.85 ; 566.93,196.85 ccw(c492.13,196.85) 566.93,196.85 ; 566.93,5708.66 ccw(c492.13,5708.66) 566.93,5708.66 ; 566.93,5708.66 ccw(c492.13,5708.66) 566.93,5708.66 ; 5582.68,196.85 ccw(c5507.87,196.85) 5582.68,196.85 ; 5582.68,196.85 ccw(c5507.87,196.85) 5582.68,196.85 ; 5582.68,5708.66 ccw(c5507.87,5708.66) 5582.68,5708.66 ; 5582.68,5708.66 ccw(c5507.87,5708.66) 5582.68,5708.66
  Bottom Layer w3.5: 566.93,196.85 ccw(c492.13,196.85) 566.93,196.85 ; 566.93,196.85 ccw(c492.13,196.85) 566.93,196.85 ; 566.93,5708.66 ccw(c492.13,5708.66) 566.93,5708.66 ; 566.93,5708.66 ccw(c492.13,5708.66) 566.93,5708.66 ; 5582.68,196.85 ccw(c5507.87,196.85) 5582.68,196.85 ; 5582.68,196.85 ccw(c5507.87,196.85) 5582.68,196.85 ; 5582.68,5708.66 ccw(c5507.87,5708.66) 5582.68,5708.66 ; 5582.68,5708.66 ccw(c5507.87,5708.66) 5582.68,5708.66

## Polygon pours and split planes (outlines as drawn)
NetF2_1 on Top Layer "NONET_L03_P-001" (solid, pour order 48): 270,4540 270,4316.57 ccw(c322.07,4316.57) 285.25,4279.75 cw(c165.16,4159.65) 335,4159.64 335,4115 cw(c290,4115) 290,4070 115,4070 cw(c115,4120) 65,4120 65,4540 cw(c110,4540) 110,4585 225,4585 cw(c225,4540)
NetF2_2 on Top Layer "NONET_L03_P-001" (solid, pour order 47): 405,4175 425,4175 425,3941.21 cw(c325.52,3941.21) 395.86,3870.86 360.61,3835.61 cw(c310.86,3885.34) 310.86,3815 95,3815 cw(c95,3840) 70,3840 70,3915 cw(c100,3915) 100,3945 248.79,3945 ccw(c248.79,4032.43) 310.61,3970.61 327,3987 ccw(c223.63,4090.63) 370,4090.64 370,4140 cw(c405,4140)
NetL1_1 on Top Layer "NONET_L03_P-001" (solid, pour order 46): 745,4290 745,4140 cw(c715,4140) 715,4110 582.59,4110 cw(c582.59,4152.2) 546.31,4130.63 ccw(c485.88,4094.67) 485.86,4165 475,4165 475,4212.93 cw(c516.21,4212.93) 487.07,4242.07 547.93,4302.93 cw(c577.07,4273.79) 577.07,4315 720,4315 cw(c720,4290)
NetF3_1 on Top Layer "NONET_L03_P-001" (solid, pour order 45): 95,5305 300,5305 cw(c300,5285) 320,5285 320,5188.6 cw(c297.92,5188.6) 304.5,5167.52 ccw(c319.14,5120.61) 270,5120.61 270,4860 cw(c230,4860) 230,4820 105,4820 cw(c105,4855) 70,4855 70,5280 cw(c95,5280)
GND on Top Layer "GND_L01_P044" (solid, pour order 44): 49.99,195 49.81,5708.66 cw(c206.43,5708.67) 196.85,5865 5800,5865 cw(c5796.83,5711.83) 5950,5708.66 5950,195 cw(c5801.58,198.42) 5798.15,50 195,50 cw(c195,195.01)
NetF3_2 on Top Layer "NETF3_2_L01_P017" (solid, pour order 17): 95,5560 420,5560 cw(c420,5515) 465,5515 465,5220 cw(c445,5220) 445,5200 396.07,5200 cw(c396.07,5220.8) 375.27,5220.73 374.77,5375.31 ccw(c329.94,5375.16) 329.94,5420 95,5420 cw(c95,5450) 65,5450 65,5530 cw(c95,5530)
Vdd on Top Layer "VDD_L01_P020" (solid, pour order 20): 4664.75,5265.25 cw(c4615.9,5216.38) 4685,5216.36 4685,4610 ccw(c4715,4610) 4715,4580 4765.09,4580 ccw(c4765.09,4619.72) 4804.82,4619.91 4800,5080 4844.62,5083.43 cw(c4725.76,4993.18) 4875,4993.16 4875,4080 ccw(c4935,4080) 4935,4020 ccw(c4935,4080) 4995,4080 4995,5051.72 ccw(c4842.27,5051.74) 4950.25,5159.75 4775.35,5334.64 ccw(c4603.09,5162.42) 4603.07,5406.01 885.32,5406.01 885,5405 ccw(c884.99,5370.01) 850,5370 850,5060 ccw(c905,5060) 905,5005 1019.08,5005 ccw(c1019.08,5127.93) 1106.01,5041.01 1149.39,5084.39 cw(c1199.13,5034.66) 1199.14,5105 1260.5,5105 ccw(c1260.5,5164.14) 1302.32,5122.32 cw(c1369.13,5055.54) 1369.14,5150 2061.72,5150 ccw(c2061.72,5285.54) 2157.56,5189.7 2233.07,5265.2 cw(c2365.34,5132.95) 2365.9,5320 3826.72,5320 cw(c3826.73,5167.25) 3934.75,5275.25 4045.7,5164.3 cw(c4023.29,5141.87) 4055,5141.85 ccw(c4091.85,5141.85) 4091.85,5105 4170,5105 ccw(c4170,5130) 4195,5130 4195,5211.36 4252.62,5308.73 cw(c4276.94,5250.03) 4301.27,5308.73 4330.53,5279.47 cw(c4199.07,5147.98) 4385,5147.96 4385,4695 ccw(c4415,4695) 4415,4665 4468.15,4665 ccw(c4468.15,4696.85) 4500,4696.85 4500,5259.65 4500,5320 cw(c4516.3,5093.81)
NetJ48_1 on Top Layer "NETJ3_1_L01_P001" (solid, pour order 3): 4382.32,1101.22 4380,1103.54 4380,1285 4600,1285 4675,1210 4675,1100
NetJ53_1 on Top Layer "NETJ53_1_L01_P002" (solid, pour order 2): 4382.32,1078.78 4380,1076.46 4380,895 4600,895 4675,970 4675,1080
Vcc on Top Layer "VCC_L01_P021" (solid, pour order 21): 2242.07,4165 2506.72,4165 cw(c2506.73,4036.4) 2597.68,4127.32 2752.49,3972.51 ccw(c2939.62,4159.65) 2939.62,3895 5200,3895 5200,3815 4820.86,3815 2724.5,3815 cw(c2724.5,4079.35) 2537.57,3892.43 2501.21,3928.79 ccw(c2401.74,3829.35) 2401.72,3970 910,3970 cw(c910,4010) 870,4010 870,4280 cw(c925,4285) 920,4340 ccw(c1010,9593.22) 1062.85,4339.49 cw(c1064.38,4187.43) 1148.28,4314.27 cw(c989.75,4074.42) 1167.12,4300.69 ccw(c1241.57,4395.71) 1241.57,4275 1291.36,4275 cw(c1291.38,4121.41) 1387.6,4241.13 ccw(c1419.2,4280.46) 1419.2,4230 2130.86,4230 cw(c2130.88,4159.69) 2180.61,4209.39 2212.93,4177.07 ccw(c2242.07,4206.21)
NetL2_2 on Top Layer "NETL2_2_L01_P019" (solid, pour order 19): 445,5175 465,5175 ccw(c465,5214.39) 504.39,5214.39 504.39,5224.41 cw(c534.95,5224.41) 534.99,5254.97 ccw(c628.54,81393.22) 700.21,5254.95 cw(c700.23,5225.44) 729.74,5225.11 ccw(c6440.1,5159.99) 730,5075 cw(c694.43,5075.13) 700,5040 ccw(c602.25,-44707.56) 487.2,5039.96 cw(c487.11,5079.06) 459.46,5051.41 cw(c515.36,5094.14) 445,5094.14
NetJ18_1 on Top Layer "NETJ18_1_L01_P000" (solid, pour order 0): 4382.32,2823.78 4380,2821.46 4380,2640 4600,2640 4675,2715 4675,2825
NetJ13_1 on Top Layer "NETJ3_1_L01_P001" (solid, pour order 1): 4382.32,2846.22 4380,2848.54 4380,3030 4600,3030 4675,2955 4675,2845
GND on Inner Layer L2 "GND_L02_P042" (solid, pour order 42): 49.99,195 49.81,5708.66 cw(c206.43,5708.67) 196.85,5865 5800,5865 cw(c5796.83,5711.83) 5950,5708.66 5950,195 cw(c5801.58,198.42) 5798.15,50 195,50 cw(c195,195.01)
GND on Inner Layer L3 "GND_L03_P043" (solid, pour order 43): 49.99,195 49.81,5708.66 cw(c206.43,5708.67) 196.85,5865 5800,5865 cw(c5796.83,5711.83) 5950,5708.66 5950,195 cw(c5801.58,198.42) 5798.15,50 195,50 cw(c195,195.01)
GND on Bottom Layer "GND_L04_P041" (solid, pour order 41): 49.99,195 49.81,5708.66 cw(c206.43,5708.67) 196.85,5865 5800,5865 cw(c5796.83,5711.83) 5950,5708.66 5950,195 cw(c5801.58,198.42) 5798.15,50 195,50 cw(c195,195.01)

## Other copper
Top Layer:
  pour cut-out: 5433.07,196.85 ccw(c5507.87,196.85) 5507.87,122.04 ccw(c5507.87,196.85) 5582.68,196.85 ccw(c5507.87,196.85) 5507.87,271.66 ccw(c5507.87,196.85)
  pour cut-out: 417.32,5708.66 ccw(c492.13,5708.66) 492.13,5633.85 ccw(c492.13,5708.66) 566.93,5708.66 ccw(c492.13,5708.66) 492.13,5783.47 ccw(c492.13,5708.66)
  pour cut-out: 5433.07,5708.66 ccw(c5507.87,5708.66) 5507.87,5633.85 ccw(c5507.87,5708.66) 5582.68,5708.66 ccw(c5507.87,5708.66) 5507.87,5783.47 ccw(c5507.87,5708.66)
  pour cut-out: 417.32,196.85 ccw(c492.13,196.85) 492.13,122.04 ccw(c492.13,196.85) 566.93,196.85 ccw(c492.13,196.85) 492.13,271.66 ccw(c492.13,196.85)
Bottom Layer:
  pour cut-out: 5433.07,196.85 ccw(c5507.87,196.85) 5507.87,122.04 ccw(c5507.87,196.85) 5582.68,196.85 ccw(c5507.87,196.85) 5507.87,271.66 ccw(c5507.87,196.85)
  pour cut-out: 417.32,5708.66 ccw(c492.13,5708.66) 492.13,5633.85 ccw(c492.13,5708.66) 566.93,5708.66 ccw(c492.13,5708.66) 492.13,5783.47 ccw(c492.13,5708.66)
  pour cut-out: 5433.07,5708.66 ccw(c5507.87,5708.66) 5507.87,5633.85 ccw(c5507.87,5708.66) 5582.68,5708.66 ccw(c5507.87,5708.66) 5507.87,5783.47 ccw(c5507.87,5708.66)
  pour cut-out: 417.32,196.85 ccw(c492.13,196.85) 492.13,122.04 ccw(c492.13,196.85) 566.93,196.85 ccw(c492.13,196.85) 492.13,271.66 ccw(c492.13,196.85)

## Silkscreen, mask and mechanical layers (free items; w line width, h text height)
Top Overlay:
  drawing of 38 lines, arcs and shapes, not listed
  text "KAAI3020_TEST" at 745,5445.06 h300
  text "V‒" at 35.19,5040 h200
  text "G" at 362.22,4750 h200 r270
  text "V+" at 50.19,4245 h200
  text "SIGNAL / LADDER / OFF" at 1310,3987.46 h100 r270
  text "Signal source" at 1595,3938.15 h70
  text "SIGNAL A IN" at 50,3500 h100
  text "400 mA / 200 mA / 75 mA / 0 A / ‒ 75 mA / ‒ 200 mA / ‒ 400 mA" at 1288.2,3425 h129.92 r270
  text "Current setting" at 1293.15,2945 h70 r270
  text "‒" at 202.21,2664.81 h200 r90
  text "SIGNAL / LADDER / OFF" at 1295,2212.46 h100 r270
  text "Signal source" at 1575,2168.15 h70
  text "CURRENT A OUT" at 265,2075 h100
  text "+" at 90,2003.9 h300
  text "SIGNAL B IN" at 55,1795 h100
  text "400 mA / 200 mA / 75 mA / 0 A / ‒ 75 mA / ‒ 200 mA / ‒ 400 mA" at 1263.2,1655 h129.92 r270
  text "Current setting" at 1273.15,1185 h70 r270
  text "‒" at 212.21,954.81 h200 r90
  text "CURRENT B OUT" at 270,365 h100
  text "+" at 100,298.9 h300
  text "Pq_max = 10W @ 25°C" at 4595,150 h100
BoardLayoutTop:
  lines w20: 0,196.85 ccw(c196.85,196.85) 196.85,0 840,0 5803.15,0 ccw(c5803.15,196.85) 6000,196.85 6000,5708.66 ccw(c5803.15,5708.66) 5803.15,5905.51 196.85,5905.51 ccw(c196.85,5708.66) 0,5708.66 0,196.85